# Altium PCB Backplane.PCBDOC
Units mil, origin at the board's own origin, x right, y up, seen from the top; angles counter-clockwise.
Board outline 3675 x 4000 mil, 4 copper layers (Top Layer, Signal Layer 1, Signal Layer 2, Bottom Layer), stack 30.634 mil thick; 91 components, 116 nets, 679 pads, 0 vias.
Unrouted connection lines stored in the file: 461.
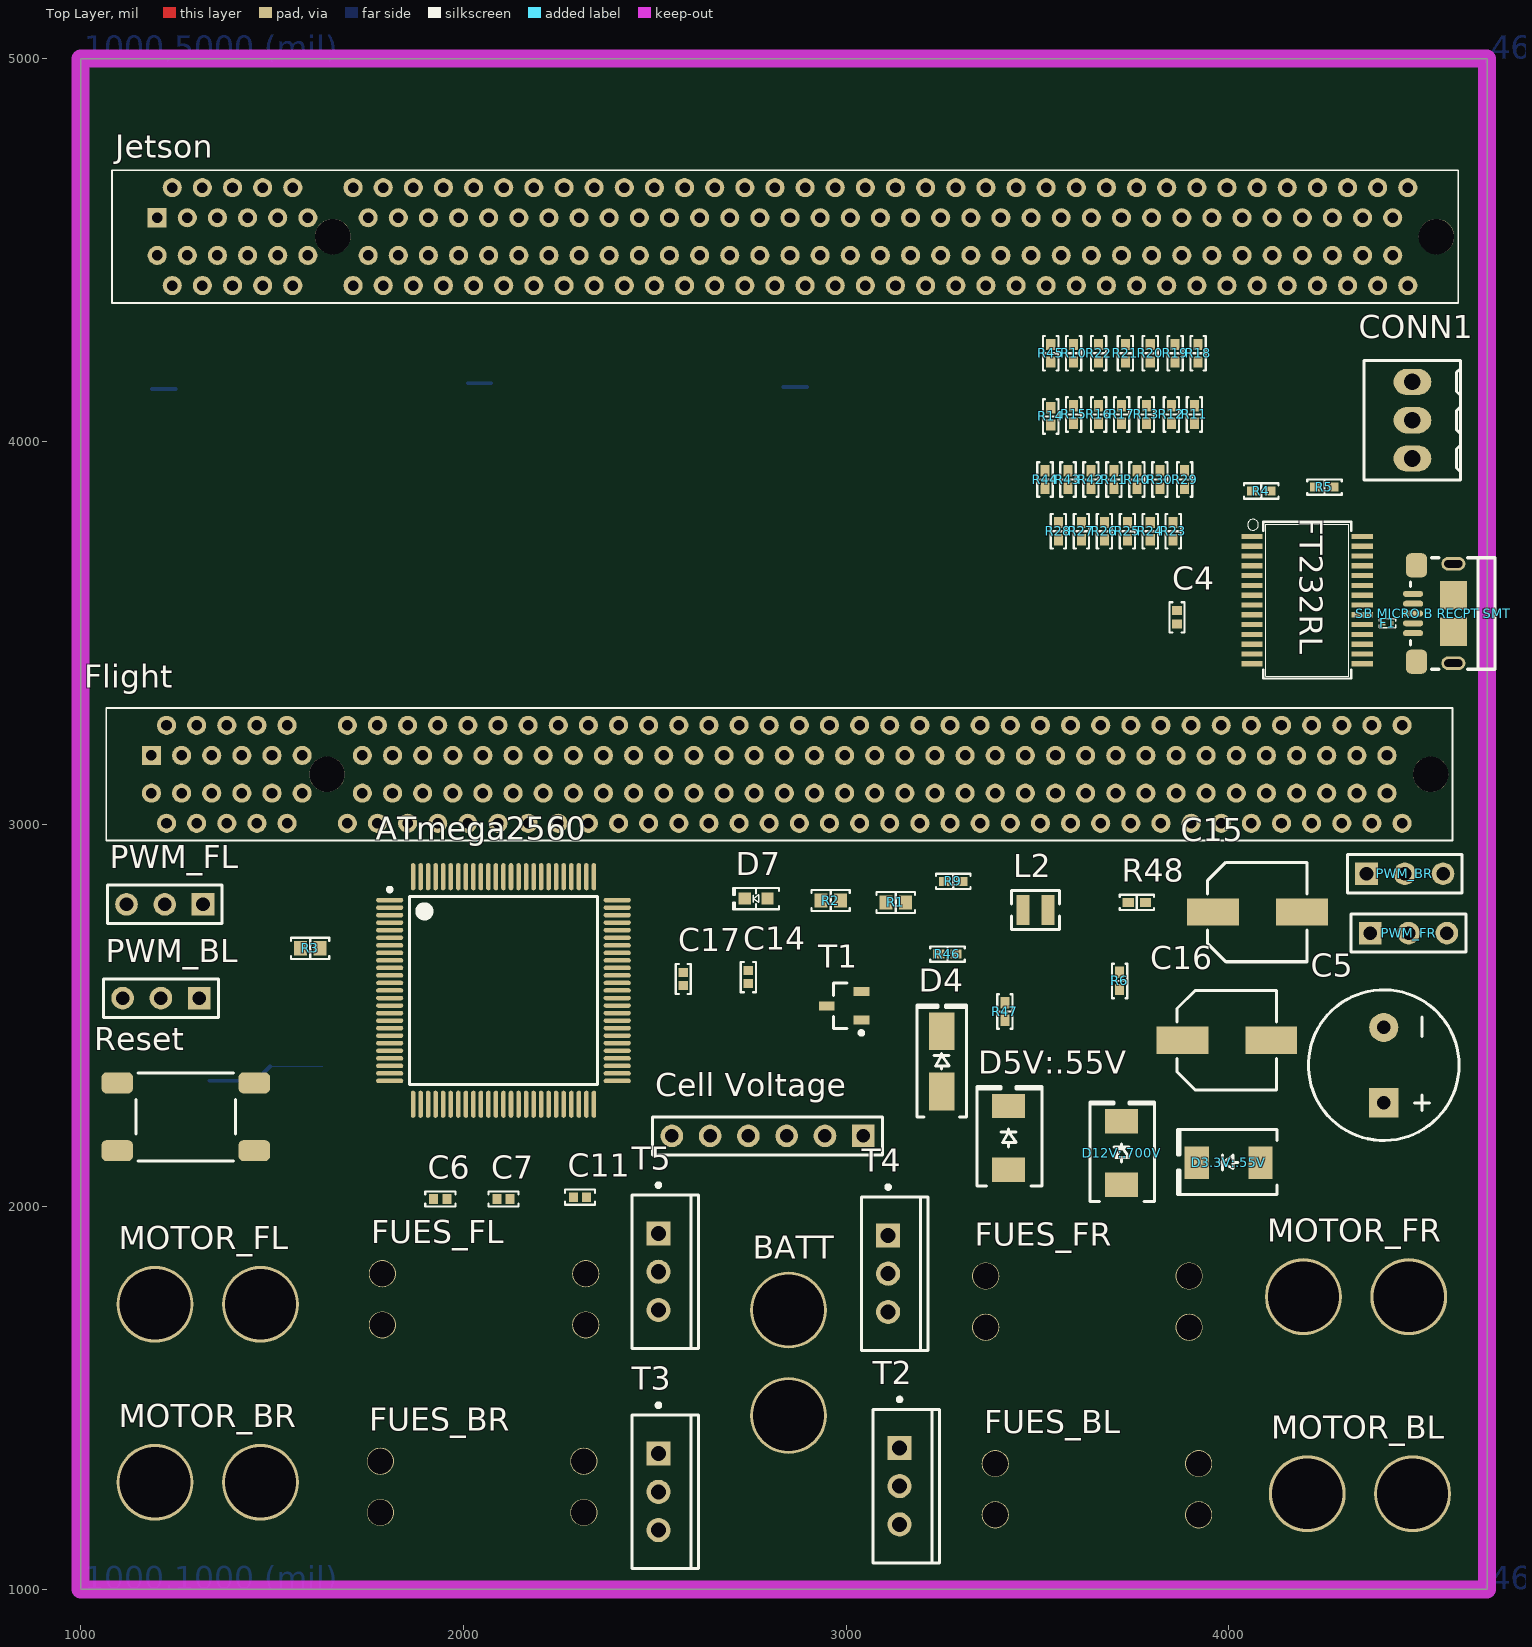
[diagram p0: Top Layer view]
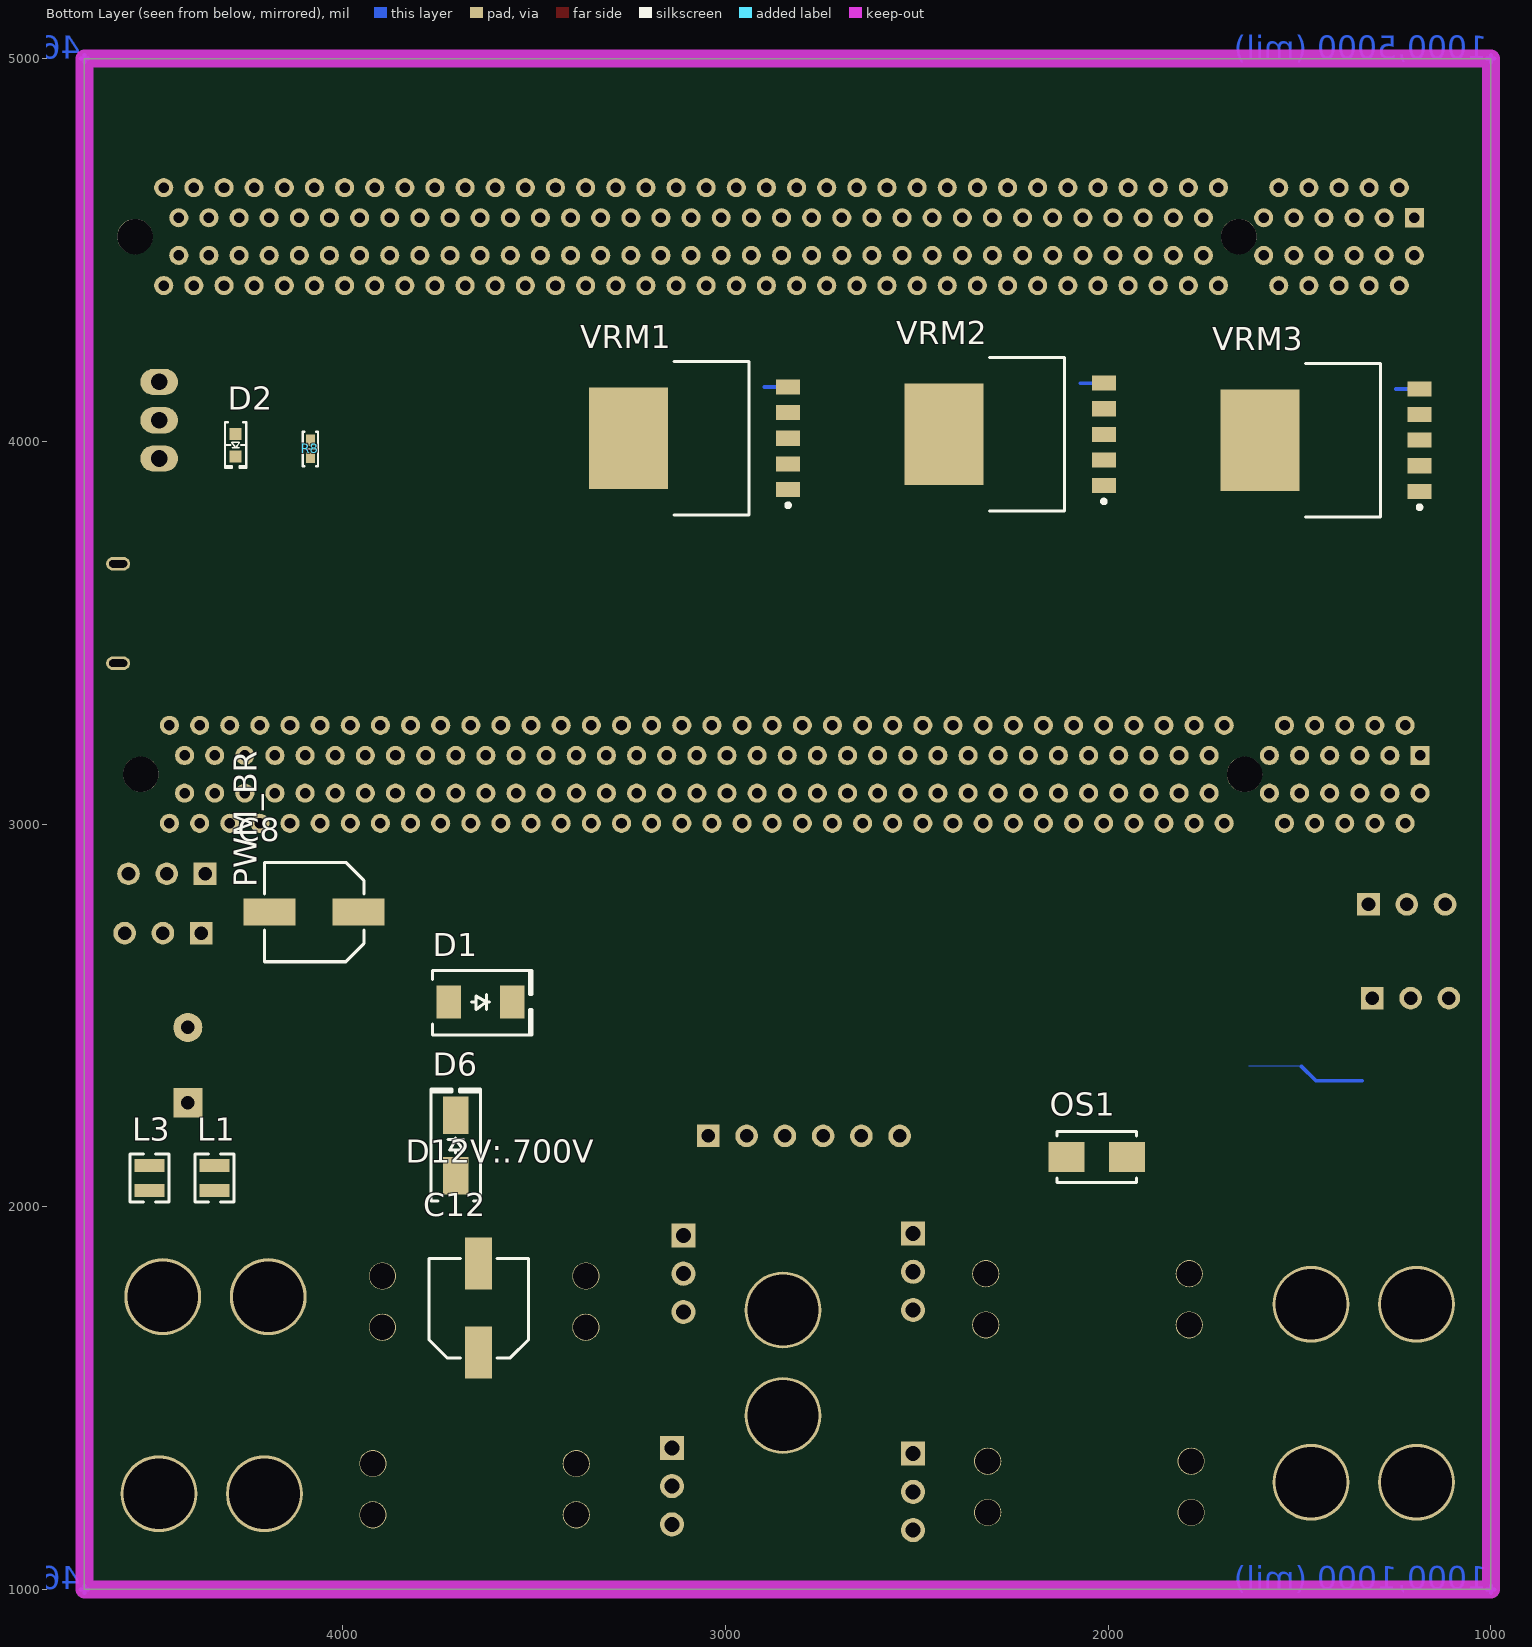
[diagram p1: Bottom Layer view, seen from below]

## Layer stack, top to bottom
Top Solder: solder mask 0.4, Solder Resist, Dk 3.5
Top Layer: signal copper 1.4
Dielectric 1: core 10, FR-4, Dk 4.2
Signal Layer 1: signal copper 1.417
Dielectric 4: prepreg 5, Dk 4.2
Signal Layer 2: signal copper 1.417
Dielectric 3: core 10, Dk 4.2
Bottom Layer: signal copper 1.4
Bottom Solder: solder mask 0.4, Solder Resist, Dk 3.5

## Board outline
1000,1000 4675,1000 4675,2015 4675,2520 4675,3035 4675,4020 4675,4515 4675,5000 1000,5000

## Design rules (kind name [scope] priority, off if disabled: settings)
Clearance Clearance_1 [All] p1: gap=5 except(10: Arc-Arc)
DiffPairsRouting [All] p1: maxlimit=10 minlimit=10 mostfreqgap=10 toplayer_minwidth=15 toplayer_maxwidth=15 toplayer_prefwidth=15 midlayer1_minwidth=15 midlayer1_maxwidth=15 midlayer1_prefwidth=15 midlayer2_minwidth=15 midlayer2_maxwidth=15 midlayer2_prefwidth=15 bottomlayer_minwidth=15 bottomlayer_maxwidth=15 bottomlayer_prefwidth=15 maxuncoupledlength=500
PolygonConnect [All] p1: connectstyle=Relief reliefconductorwidth=10 reliefentries=4 polygonreliefangle="90 Angle" airgapwidth=10
RoutingVias [All] p1: holewidth=28 width=50 viastyle="Through Hole" minholewidth=28 minwidth=50 maxholewidth=28 maxwidth=50
SMDNeckDown [All] p1: percent=25.000
SolderMaskExpansion [All] p1: expansion=4
Width "Power 3.3V" [InNet('3.3V')] p1: maxlimit=100 minlimit=50 preferedwidth=75 minimp=50.000000 maximp=50.000000 favimp=50.000000
Width "Power 5V" [InNet('5V')] p2: maxlimit=200 minlimit=10 preferedwidth=75 minimp=50.000000 maximp=50.000000 favimp=50.000000
Width "Power 12V" [InNet('12V')] p3: maxlimit=200 minlimit=10 preferedwidth=75 minimp=50.000000 maximp=50.000000 favimp=50.000000
Width Batt_VDD [InNet('BATT_VDD')] p4: maxlimit=200 minlimit=10 preferedwidth=75 minimp=50.000000 maximp=50.000000 favimp=50.000000
Width [All] p5: maxlimit=200 minlimit=5 preferedwidth=10 minimp=50.000000 maximp=50.000000 favimp=50.000000
29 further rules are at their usual default settings.

## Classes and differential pairs
component class "Motor Controls": FUES_BL FUES_BR FUES_FL FUES_FR MOTOR_BL MOTOR_BR MOTOR_FL MOTOR_FR PWM_BL PWM_BR PWM_FL PWM_FR
component class "BackPlane Connector": Flight Jetson
net class CV[5..0]: CV0 CV1 CV2 CV3 CV4 CV5
component class U_VoltageRegulator12V: C16 C17 C43 C44 C45 C46 D10 D12V:.700V L3 R59 R60 R61 R62 R63 R66 R67 R68 T10 T11 VRM3
component class U_VoltageRegulator5V: C14 C15 C23 C24 C25 C26 C27 C28 C29 C30 C31 C32 C33 C34 D5V:.55V D9 L2 R55 R56 R57 R58 R64 R65 T8 T9 VRM2
component class U_VoltageRegulator3: C11 C12 C51 D3.3V:.55V D8 L1 R49 R50 R52 R53 R54 T6 T7 VRM1
component class MCU-Atmega2560: ATmega2560 C6 C7 C8 CONN1 D6 D7 OS1 R46 R47 R48
component class Programmer: C4 C5 D2 D4 F1 FT232RL R4 R5 R6 R8 R9 Reset "SB MICRO B RECPT SMT"
component class "Kill Switch": D1 R1 R2 R3 T1 T2 T3 T4 T5
component class BatteryCircuit: BATT "Cell Voltage" R10 R11 R12 R13 R14 R15 R16 R17 R18 R19 R20 R21 R22 R23 R24 R25 R26 R27 R28 R29 R30 R40 R41 R42 R43 R44 R45
differential pair LVDS_8: +LVDS_8_P -LVDS_8_N
differential pair LVDS_7: +LVDS_7_P -LVDS_7_N
differential pair LVDS_6: +LVDS_6_P -LVDS_6_N
differential pair LVDS_5: +LVDS_5_P -LVDS_5_N
differential pair LVDS_4: +LVDS_4_P -LVDS_4_N
differential pair LVDS_3: +LVDS_3_P -LVDS_3_N
differential pair LVDS_2: +LVDS_2_P -LVDS_2_N
differential pair LVDS_1: +LVDS_1_P -LVDS_1_N

## Components (designator, comment, footprint, x,y, rotation, side; value= is the part's Value field where it differs from the comment)
ATmega2560 "ATmega2560-16AU" 100A_N 2105,2565 r0 top
BATT "XT60" XT60#1 2850,1730 r180 top
C4 "0.1uF" "CAP 0402/1005" 3865,3540 r270 top
C5 "10uF" CPOL-RADIAL-5MM-10MM-KIT 4405,2370 r270 top
C6 "0.1uF" "CAP 0402/1005" 1940,2020 r0 top
C7 "0.1uF" "CAP 0402/1005" 2105,2020 r180 top
C8 "33uF" "CAP ALUM 6.6MM" 4075,2770 r0 bottom
C11 "0.1uF" "CAP 0402/1005" 2305,2025 r0 top
C12 "100uF" "CAP ALUM 6.6MM" 3645,1735 r90 bottom
C14 "0.1uF" "CAP 0402/1005" 2745,2600 r270 top
C15 "100uF" "CAP ALUM 6.6MM" 4075,2770 r0 top
C16 "100uF" "CAP ALUM 6.6MM" 3995,2435 r0 top
C17 "0.1uF" "CAP 0402/1005" 2575,2595 r270 top
"Cell Voltage" "Header 6" HDR1X6 3045,2185 r180 top
CONN1 "282834-3" "TE 282834-3" 4480,4055 r270 top
D1 "SMBJ30A-TR" "ST DO214AA SMB" 3640,2535 r180 bottom
D2 "Green" "LED 0603/1608 GREEN" 4280,3990 r270 bottom
D3.3V:.55V "SMLVT3V3" "ST DO214AA SMB" 4000,2115 r180 top
D4 "SMAJ5.0A" "DO214AC SMA" 3250,2380 r90 top
D5V:.55V "SMLVT3V3" "ST DO214AA SMB" 3425,2180 r90 top
D6 "SMAJ5.0A" "DO214AC SMA" 3705,2160 r90 bottom
D7 "White" "LED 0603/1608" 2765,2805 r180 top
D12V:.700V "SMLVT3V3" "ST DO214AA SMB" 3720,2140 r90 top
F1 "120 Ohm @ 100MHz" "FER 0201/0603" 4415,3525 r180 top
Flight "Copy from  con-pci_express(pci-e).lbr uploaded Mon Jul 2 10:15:25 2007   Library for PCI-Express x16 (PCI-E) connector. Includes connector and card edge pattern. Uploaded by JF Duval <jfduval@aqra.ca> from AQRA.ca" PCI-E-164 2760,3120 r0 top
FT232RL "FT232RL USB UART    This is the simplified version of the FT232RL unit. Only what you need, nothing you don't.   FT232RL 4th Generation USB UART (USB <-> Serial) Controller.   Datasheet SparkFun Products  Component (COM-00650)  SparkFun RedBot Mainboard (ROB-12097)  SparkFun FTDI Basic Breakout - 5V (DEV-09716)  SparkFun FTDI Basic Breakout - 3.3V (DEV-09873)  Bus Pirate - v3.6a (TOL-12942)  SparkFun USB to Serial Breakout - FT232RL (BOB-12731)  SparkFun PicoBoard (WIG-11888)  SparkFun RFID USB Reader (SEN-09963)  LilyPad FTDI Basic Breakout - 5V (DEV-10275)  SparkFun Stepoko (ROB-13899)" SSOP28DB 4205,3585 r270 top
FUES_BL "Blade Fuse" "Blade Fuse Holder" 3390,1195 r0 top locked
FUES_BR "Blade Fuse" "Blade Fuse Holder" 2315,1335 r180 top
FUES_FL "Blade Fuse" "Blade Fuse Holder" 2320,1825 r180 top
FUES_FR "Blade Fuse" "Blade Fuse Holder" 3365,1685 r0 top
Jetson "Copy from  con-pci_express(pci-e).lbr uploaded Mon Jul 2 10:15:25 2007   Library for PCI-Express x16 (PCI-E) connector. Includes connector and card edge pattern. Uploaded by JF Duval <jfduval@aqra.ca> from AQRA.ca" PCI-E-164 2775,4525 r0 top
L1 "1uH" "TDK VLS252010CX" 4335,2075 r90 bottom
L2 "1uH" "TDK VLS252010CX" 3495,2775 r0 top
L3 "1uH" "TDK VLS252010CX" 4505,2075 r90 bottom
MOTOR_BL "XT60" XT60#1 4205,1250 r270 top
MOTOR_BR "XT60" XT60#2 1470,1280 r90 top
MOTOR_FL "XT60" XT60#1 1470,1745 r90 top
MOTOR_FR "XT60" XT60#1 4195,1765 r270 top
OS1 "10MHz" "NDK NX5032GA" 2030,2130 r0 bottom
PWM_BL "Header 3" HDR1X3 1310,2545 r180 top
PWM_BR "Header 3" HDR1X3 4360,2870 r0 top
PWM_FL "Header 3" HDR1X3 1320,2790 r180 top
PWM_FR "Header 3" HDR1X3 4370,2715 r0 top
R1 "0.0" "RES 0603/1608" 3130,2795 r180 top
R2 "0.0" "RES 0603/1608" 2960,2800 r0 top
R3 "0.0" "RES 0603/1608" 1600,2675 r0 top
R4 "10k" "RES 0402/1005" 4085,3870 r180 top
R5 "10k" "RES 0402/1005" 4250,3880 r0 top
R6 "10k" "RES 0402/1005" 3715,2590 r270 top
R8 "10k" "RES 0402/1005" 4085,3980 r270 bottom
R9 "10K" "RES 0402/1005" 3280,2850 r0 top
R10 "10k" "RES 0402/1005" 3595,4230 r90 top
R11 "10k" "RES 0402/1005" 3910,4070 r270 top
R12 "10k" "RES 0402/1005" 3850,4070 r90 top
R13 "10k" "RES 0402/1005" 3785,4070 r270 top
R14 "10k" "RES 0402/1005" 3535,4065 r90 top
R15 "10k" "RES 0402/1005" 3595,4070 r270 top
R16 "10k" "RES 0402/1005" 3660,4070 r90 top
R17 "10k" "RES 0402/1005" 3720,4070 r270 top
R18 "10k" "RES 0402/1005" 3920,4230 r90 top
R19 "10k" "RES 0402/1005" 3860,4230 r270 top
R20 "10k" "RES 0402/1005" 3795,4230 r90 top
R21 "10k" "RES 0402/1005" 3730,4230 r270 top
R22 "10k" "RES 0402/1005" 3660,4230 r90 top
R23 "10k" "RES 0402/1005" 3855,3765 r270 top
R24 "10k" "RES 0402/1005" 3795,3765 r270 top
R25 "10k" "RES 0402/1005" 3735,3765 r90 top
R26 "10k" "RES 0402/1005" 3675,3765 r270 top
R27 "10k" "RES 0402/1005" 3615,3765 r90 top
R28 "10k" "RES 0402/1005" 3555,3765 r270 top
R29 "10k" "RES 0402/1005" 3885,3900 r270 top
R30 "10k" "RES 0402/1005" 3820,3900 r90 top
R40 "10k" "RES 0402/1005" 3760,3900 r270 top
R41 "10k" "RES 0402/1005" 3700,3900 r90 top
R42 "10k" "RES 0402/1005" 3640,3900 r90 top
R43 "10k" "RES 0402/1005" 3580,3900 r270 top
R44 "10k" "RES 0402/1005" 3520,3900 r90 top
R45 "10k" "RES 0402/1005" 3535,4230 r270 top
R46 "10K" "RES 0402/1005" 3265,2660 r180 top
R47 "10K" "RES 0402/1005" 3415,2510 r90 top
R48 "10K" "RES 0402/1005" 3760,2795 r180 top
Reset "FSM6JSMA" "TE FSM6JSMA" 1275,2235 r90 top
"SB MICRO B RECPT SMT" "Micro USB" "FCI USB 10118193-0001LF" 4585,3550 r270 top
T1 "BSS215P H6327" INF-PG-SOT23_N 2995,2525 r180 top
T2 "IPP120P04P4L-03" INF-PG-TO220-3-1 3140,1270 r0 top
T3 "IPP120P04P4L-03" INF-PG-TO220-3-1 2510,1255 r0 top
T4 "IPP120P04P4L-03" INF-PG-TO220-3-1 3110,1825 r0 top
T5 "IPP120P04P4L-03" INF-PG-TO220-3-1 2510,1830 r0 top
VRM1 "LM2596SX-12" DPAK170P1418X200-6L 5120,4945 r0 bottom
VRM2 "LM2596SX-12" DPAK170P1418X200-6L 4295,4955 r0 bottom
VRM3 "LM2596SX-12" DPAK170P1418X200-6L 3470,4940 r0 bottom

## Footprints (in the part's own frame and the unit in brackets; to place one, negate y for a bottom-side part, rotate by r counter-clockwise, add the part's x,y. Pads: shape width x height; smd on the part's side, far side on the other; paste and mask are expansions set on the pad)
100A_N [mm] "Thin QFP, 100-Leads, Body 14x14mm, Pitch 0.5mm, IPC Medium Density"
  oval 1.8x0.3 smd: 1(-7.55,6) 2(-7.55,5.5) 3(-7.55,5) 4(-7.55,4.5) 5(-7.55,4) 6(-7.55,3.5) 7(-7.55,3) 8(-7.55,2.5) 9(-7.55,2) 10(-7.55,1.5) 11(-7.55,1) 12(-7.55,0.5) 13(-7.55,0) 14(-7.55,-0.5) 15(-7.55,-1) 16(-7.55,-1.5) 17(-7.55,-2) 18(-7.55,-2.5) 19(-7.55,-3) 20(-7.55,-3.5) 21(-7.55,-4) 22(-7.55,-4.5) 23(-7.55,-5) 24(-7.55,-5.5) 25(-7.55,-6) 51(7.55,-6) 52(7.55,-5.5) 53(7.55,-5) 54(7.55,-4.5) 55(7.55,-4) 56(7.55,-3.5) 57(7.55,-3) 58(7.55,-2.5) 59(7.55,-2) 60(7.55,-1.5) 61(7.55,-1) 62(7.55,-0.5) 63(7.55,0) 64(7.55,0.5) 65(7.55,1) 66(7.55,1.5) 67(7.55,2) 68(7.55,2.5) 69(7.55,3) 70(7.55,3.5) 71(7.55,4) 72(7.55,4.5) 73(7.55,5) 74(7.55,5.5) 75(7.55,6)
  oval 0.3x1.8 smd: 26(-6,-7.55) 27(-5.5,-7.55) 28(-5,-7.55) 29(-4.5,-7.55) 30(-4,-7.55) 31(-3.5,-7.55) 32(-3,-7.55) 33(-2.5,-7.55) 34(-2,-7.55) 35(-1.5,-7.55) 36(-1,-7.55) 37(-0.5,-7.55) 38(0,-7.55) 39(0.5,-7.55) 40(1,-7.55) 41(1.5,-7.55) 42(2,-7.55) 43(2.5,-7.55) 44(3,-7.55) 45(3.5,-7.55) 46(4,-7.55) 47(4.5,-7.55) 48(5,-7.55) 49(5.5,-7.55) 50(6,-7.55) 76(6,7.55) 77(5.5,7.55) 78(5,7.55) 79(4.5,7.55) 80(4,7.55) 81(3.5,7.55) 82(3,7.55) 83(2.5,7.55) 84(2,7.55) 85(1.5,7.55) 86(1,7.55) 87(0.5,7.55) 88(0,7.55) 89(-0.5,7.55) 90(-1,7.55) 91(-1.5,7.55) 92(-2,7.55) 93(-2.5,7.55) 94(-3,7.55) 95(-3.5,7.55) 96(-4,7.55) 97(-4.5,7.55) 98(-5,7.55) 99(-5.5,7.55) 100(-6,7.55)
  silkscreen extent -7.67,-6.25 6.25,6.82, body extent -7,-7 7,7, height 1.2
"Blade Fuse Holder" [mm] "Automotive blade fuse holder"
  round 1.8 hole 1.7: DRAIN(13.5,0) DRAIN(13.5,3.4) SRC(0,0) SRC(0,3.4)
"CAP 0402/1005" [mm] "Chip Capacitor, 2-Leads, Body 1.02x0.51mm, IPC Medium Density"
  rect 0.6x0.64 smd: 1(-0.44,0) 2(0.44,0)
  silkscreen extent -1,-0.5 1,0.5, body extent -0.5,-0.26 0.5,0.26, height 0.52
"CAP ALUM 6.6MM" [mm] "Aluminum Electrolytic Capacitor, Body 6.60x6.60x7.70mm, IPC Low Density"
  rect 3.45x1.8 smd: 1(-2.95,0) 2(2.95,0)
  silkscreen extent -3.3,-3.3 3.3,3.3, body extent -3.5,-3.3 3.5,3.3, height 7.7
CPOL-RADIAL-5MM-10MM-KIT [mil]
  rect 76x76 hole 35.43: +(98.43,0)
  round 76 hole 35.43: -(-98.43,0)
  silkscreen extent -197,-197 197,197
"DO214AC SMA" [mm] "Molded Diode, 2-Leads, Body 4.30x2.60mm, IPC Medium Density"
  rect 2.5x1.7 smd: 1(-2,0) 2(2,0)
  silkscreen extent -3.68,-1.65 3.75,1.65, body extent -2.6,-1.37 2.6,1.37, height 2.4
DPAK170P1418X200-6L [mm] "D2-PAK, 6-Pads, Body 8.02x8.44mm (max), IPC High Density"
  rect 1.6x1 smd: FB(-58,22.1) GND(-58,23.8) ON/OFF(-58,20.4) Output(-58,25.5) VIN(-58,27.2)
  rect 5.24x6.75 smd: GND(-47.4,23.8)
  silkscreen extent -58.12,18.7 -50.42,28.9, body extent -55.4,18.73 -45.55,28.88, height 2
"FCI USB 10118193-0001LF" [mm] "USB 2.0 Type B Micro"
  oval 0.4x1.35 smd: 1(1.3,-2.625) 2(0.65,-2.625) 3(0,-2.625) 4(-0.65,-2.625) 5(-1.3,-2.625)
  oval 0.9x1.6 hole 0.5 slot 1.2 at 90 deg: S(-3.3,0.05) S(3.3,0.05)
  rrect50% 1.6x1.4 smd: S(-3.2,-2.4) S(3.2,-2.4)
  rect 1.9x1.8 smd: S(-1.2,0.05) S(1.2,0.05)
  silkscreen extent -3.7,-2.8 3.7,2.8, body extent -3.93,-2.9 3.93,2.76, height 2.78
"FER 0201/0603" [mm] "Chip Inductor, 2-Leads, Body 0.60x0.30mm, IPC Medium Density"
  rect 0.25x0.3 smd: 1(-0.275,0) 2(0.275,0)
  silkscreen extent -0.55,-0.3 0.55,0.3, body extent -0.3,-0.15 0.3,0.15, height 0.29
HDR1X3 [mm] "Connector; Header; 3 Position"
  rect 1.5x1.5 hole 0.9: 1(0,0)
  round 1.5 hole 0.9: 2(2.54,0) 3(5.08,0)
  silkscreen extent -1.27,-1.27 6.35,1.27
HDR1X6 [mm] "Connector; Header; 6 Position"
  rect 1.5x1.5 hole 0.9: 1(0,0)
  round 1.5 hole 0.9: 2(2.54,0) 3(5.08,0) 4(7.62,0) 5(10.16,0) 6(12.7,0)
  silkscreen extent -1.27,-1.27 13.97,1.27
INF-PG-SOT23_N [mm] "SOT23, 3-Leads, Body 2.9x1.3mm, Pitch 0.95mm, IPC Medium Density"
  rect 1.05x0.6 smd: 1(-1.15,0.95) 2(-1.15,-0.95) 3(1.15,0)
  silkscreen extent -1.28,-1.5 0.7,1.92, body extent -0.7,-1.5 0.7,1.5, height 1.1
INF-PG-TO220-3-1 [mm] "FM, 3-Leads, Body 10x4.4mm, Pitch 2.54mm"
  rect 1.6x1.6 hole 1: 1(0,2.54)
  round 1.6 hole 1: 2(0,0) 3(0,-2.54)
  silkscreen extent -1.75,-5.1 2.65,5.87, body extent -1.75,-5.1 2.65,5.1, height 20.7
"LED 0603/1608" [mm] "Chip Diode, 2-Leads, Body 1.60x0.80mm, IPC Medium Density"
  rect 0.8x0.8 smd: 1(-0.75,0) 2(0.75,0)
  silkscreen extent -1.52,-0.7 1.52,0.7, body extent -0.8,-0.4 0.8,0.4, height 0.53
"LED 0603/1608 GREEN" [mm] "Chip Diode, 2-Leads, Body 1.60x0.80mm, IPC Medium Density"
  rect 0.8x0.8 smd: 1(-0.75,0) 2(0.75,0)
  silkscreen extent -1.52,-0.7 1.52,0.7, body extent -0.8,-0.4 0.8,0.4, height 0.53
"NDK NX5032GA" [mm] "Crystal, 2-Leads, Body 5.00x3.20mm, IPC Medium Density"
  rect 2.4x2 smd: 1(-2,0) 2(2,0)
  silkscreen extent -2.65,-1.7 2.65,1.7, body extent -2.5,-1.6 2.5,1.6, height 1.2
PCI-E-164 [mm]
  round 2.35 hole 2.35: 1(-28.35,0.25) 1(44.9,0.25)
  rect 1.27x1.27 hole 0.7: A1(-40,1.5)
  round 1.27 hole 0.7: A2(-39,3.5) A3(-38,1.5) A4(-37,3.5) A5(-36,1.5) A6(-35,3.5) A7(-34,1.5) A8(-33,3.5) A9(-32,1.5) A10(-31,3.5) A11(-30,1.5) A12(-27,3.5) A13(-26,1.5) A14(-25,3.5) A15(-24,1.5) A16(-23,3.5) A17(-22,1.5) A18(-21,3.5) A19(-20,1.5) A20(-19,3.5) A21(-18,1.5) A22(-17,3.5) A23(-16,1.5) A24(-15,3.5) A25(-14,1.5) A26(-13,3.5) A27(-12,1.5) A28(-11,3.5) A29(-10,1.5) A30(-9,3.5) A31(-8,1.5) A32(-7,3.5) A33(-6,1.5) A34(-5,3.5) A35(-4,1.5) A36(-3,3.5) A37(-2,1.5) A38(-1,3.5) A39(0,1.5) A40(1,3.5) A41(2,1.5) A42(3,3.5) A43(4,1.5) A44(5,3.5) A45(6,1.5) A46(7,3.5) A47(8,1.5) A48(9,3.5) A49(10,1.5) A50(11,3.5) A51(12,1.5) A52(13,3.5) A53(14,1.5) A54(15,3.5) A55(16,1.5) A56(17,3.5) A57(18,1.5) A58(19,3.5) A59(20,1.5) A60(21,3.5) A61(22,1.5) A62(23,3.5) A63(24,1.5) A64(25,3.5) A65(26,1.5) A66(27,3.5) A67(28,1.5) A68(29,3.5) A69(30,1.5) A70(31,3.5) A71(32,1.5) A72(33,3.5) A73(34,1.5) A74(35,3.5) A75(36,1.5) A76(37,3.5) A77(38,1.5) A78(39,3.5) A79(40,1.5) A80(41,3.5) A81(42,1.5) A82(43,3.5) B1(-40,-1) B2(-39,-3) B3(-38,-1) B4(-37,-3) B5(-36,-1) B6(-35,-3) B7(-34,-1) B8(-33,-3) B9(-32,-1) B10(-31,-3) B11(-30,-1) B12(-27,-3) B13(-26,-1) B14(-25,-3) B15(-24,-1) B16(-23,-3) B17(-22,-1) B18(-21,-3) B19(-20,-1) B20(-19,-3) B21(-18,-1) B22(-17,-3) B23(-16,-1) B24(-15,-3) B25(-14,-1) B26(-13,-3) B27(-12,-1) B28(-11,-3) B29(-10,-1) B30(-9,-3) B31(-8,-1) B32(-7,-3) B33(-6,-1) B34(-5,-3) B35(-4,-1) B36(-3,-3) B37(-2,-1) B38(-1,-3) B39(0,-1) B40(1,-3) B41(2,-1) B42(3,-3) B43(4,-1) B44(5,-3) B45(6,-1) B46(7,-3) B47(8,-1) B48(9,-3) B49(10,-1) B50(11,-3) B51(12,-1) B52(13,-3) B53(14,-1) B54(15,-3) B55(16,-1) B56(17,-3) B57(18,-1) B58(19,-3) B59(20,-1) B60(21,-3) B61(22,-1) B62(23,-3) B63(24,-1) B64(25,-3) B65(26,-1) B66(27,-3) B67(28,-1) B68(29,-3) B69(30,-1) B70(31,-3) B71(32,-1) B72(33,-3) B73(34,-1) B74(35,-3) B75(36,-1) B76(37,-3) B77(38,-1) B78(39,-3) B79(40,-1) B80(41,-3) B81(42,-1) B82(43,-3)
  silkscreen extent -43,-4.15 46.35,4.65
"RES 0402/1005" [mm] "Chip Resistor, 2-Leads, Body 1.0x0.5mm, IPC Medium Density"
  rect 0.75x0.6 smd: 1(-0.575,0) 2(0.575,0)
  silkscreen extent -1.14,-0.51 1.14,0.51, body extent -0.5,-0.25 0.5,0.25, height 0.35
"RES 0603/1608" [mm] "Chip Resistor, 2-Leads, Body 1.60x0.80mm, IPC Medium Density"
  rect 0.85x0.95 smd: 1(-0.65,0) 2(0.65,0)
  silkscreen extent -1.27,-0.7 1.27,0.7, body extent -0.8,-0.4 0.8,0.4, height 0.45
SSOP28DB [mil]
  rect 13.7x55 smd: 1(-166.34,-143.94) 2(-140.75,-143.94) 3(-115.16,-143.94) 4(-89.57,-143.94) 5(-63.98,-143.94) 6(-38.39,-143.94) 7(-12.8,-143.94) 8(12.8,-143.94) 9(38.39,-143.94) 10(63.98,-143.94) 11(89.57,-143.94) 12(115.16,-143.94) 13(140.75,-143.94) 14(166.34,-143.94) 15(166.34,143.94) 16(140.75,143.94) 17(115.16,143.94) 18(89.57,143.94) 19(63.98,143.94) 20(38.39,143.94) 21(12.8,143.94) 22(-12.8,143.94) 23(-38.39,143.94) 24(-63.98,143.94) 25(-89.57,143.94) 26(-115.16,143.94) 27(-140.75,143.94) 28(-166.34,143.94)
  silkscreen extent -211,-156 205,115
"ST DO214AA SMB" [mm] "Molded Diode, 2-Leads, Body 4.31x3.62mm, IPC Medium Density"
  rect 1.62x2.18 smd: 1(-2.11,0) 2(2.11,0)
  silkscreen extent -3.2,-2.2 3.4,2.1, body extent -2.6,-1.8 2.6,1.8, height 2.4
"TDK VLS252010CX" [mm] "Chip Inductor, 2-Leads, Body 2.50x2.00mm, IPC Medium Density"
  rect 0.85x2 smd: 1(-0.825,0) 2(0.825,0)
  silkscreen extent -1.6,-1.3 1.6,1.3, body extent -1.25,-1 1.25,1, height 1
"TE 282834-3" [mm]
  oval 1.75x2.5 hole 1.1: 1(-2.54,0) 2(0,0) 3(2.54,0)
  silkscreen extent -3.97,-3.2 3.97,3.2, body extent -4.04,-3.25 4.04,3.25, height 10
"TE FSM6JSMA" [mm]
  rrect50% 1.4x2.1 smd: 1(2.25,4.55) 2(2.25,-4.55) 3(-2.25,4.55) 4(-2.25,-4.55)
  silkscreen extent -2.92,-3.3 2.92,3.3, body extent -3,-5 3,5, height 7.11
XT60#1 [mm] "XT60 Connector"
  round 5.1 hole 4.7: GND(0,7) VDD(0,0)
XT60#2 [mm] "XT60 Connector"
  round 5.1 hole 4.7: GND(0,7)
  round 5.1 hole 4.7 mask+0.102: VDD(0,0)

## Part data
ATmega2560: "8-bit AVR Microcontroller, 4.5-5.5V, 256KB Flash, 4KB EEPROM, 8KB SRAM, 86 GPIO pins, 100-pin TQFP, Industrial Grade (-40°C to 85°C), Pb-Free"
C4 C6 C7 C11 C14 C17: library part C1005X7R1C104K050BC, "CAP CER 0.1UF 16V X7R 0402"
C5: library part 1000UF-RADIAL-5MM-35V-20%-KIT
C8: library part UWX1C330MCL1GB, "CAP ALUM 33UF 20% 16V SMD"
C12 C15 C16: library part 16SVPC100M, "CAP POLYMER 100UF 20% 16V SMD"
"Cell Voltage": "Header, 6-Pin"
CONN1: "TERM BLOCK 3POS SIDE ENT 2.54MM"
D1: "TVS DIODE 30VWM 64.3VC SMB"
D2: library part LTST-C191KGKT, "LED GREEN CLEAR 0603 SMD"
D3.3V:.55V D5V:.55V D12V:.700V: "TVS DIODE 3.3VWM 10.3VC SMB"
D4 D6: "TVS DIODE 5VWM 9.2VC SMA"
D7: library part LTW-C191TS5, "LED WHITE 0603 SMD"
F1: library part BLM03AG121SN1D, "FERRITE BEAD 120 OHM 0201 1LN"
Flight Jetson: library part PCI-E-164SOCKET
FT232RL: library part FT232RL-BASICSSOP
L1 L2 L3: library part VLS252010CX-1R0M, "FIXED IND 1UH 2.29A 65 MOHM SMD"
OS1: library part NX5032GA-10.000M-STD-CSU-1, "CRYSTAL 10.0000MHZ 8PF SMD"
PWM_BL PWM_BR PWM_FL PWM_FR: "Header, 3-Pin"
R1 R2 R3: library part 5110, "RES SMD 0.0 OHM JUMPER 1/2W 0603"
R4 R5 R6 R8 R9 R10 R11 R12 R13 R14 R15 R16 R17 R18 R19 R20 R21 R22 R23 R24 R25 R26 R27 R28 R29 R30 R40 R41 R42 R43 R44 R45 R46 R47 R48: library part ERJ-2RKF1002X, "RES SMD 10K OHM 1% 1/10W 0402"
Reset: "SWITCH TACTILE SPST-NO 0.05A 24V"
"SB MICRO B RECPT SMT": library part 10118193-0001LF, "CONN USB MICRO B RECPT SMT R/A"
T1: "P-Channel OptiMOS P2 Small-Signal-Transistor, -20 V VDS, -1.5 A ID, -55 to 150 degC, PG-SOT23, Reel, Green"
T2 T3 T4 T5: "OptiMOS-P2 Power-Transistor, -40 V VDS, -120 A ID, PG-TO220-3-1, Tube, Green"

## Nets (pads, with @x,y where several pads share a name; then routed paths per layer and width w, separated by ;. In a path a pad name is that pad's centre, name@x,y a point inside that pad or via, vN(x,y) a via of type N, cw(c..) or ccw(c..) an arc to the next point about the centre after c; other vN are vias at no path point)
3.3V: C12.1 Flight.A16 Flight.A41 Flight.B16 Jetson.A16 Jetson.A41 Jetson.B16 L1.2 VRM1.FB
5V: ATmega2560.10 ATmega2560.31 ATmega2560.61 ATmega2560.80 ATmega2560.98 C15.1 CONN1.2 D6.2 Flight.A8 Flight.A47 Flight.B8 Flight.B26 Flight.B40 FT232RL.4 Jetson.A8 Jetson.A47 Jetson.B8 Jetson.B26 Jetson.B40 L2.2 PWM_BL.2 PWM_BR.2 PWM_FL.2 PWM_FR.2 R3.2 R6.1 R8.1 R9.2 R47.2 R48.2 VRM2.FB
12V: C16.1 Flight.A3 Flight.A11 Flight.A19 Flight.A31 Flight.A44 Flight.B3 Flight.B11 Flight.B19 Flight.B32 Flight.B49 Flight.B50 Flight.B51 Flight.B52 Flight.B53 Flight.B54 Flight.B55 Flight.B56 Flight.B57 Flight.B58 Flight.B59 Flight.B60 Flight.B61 Flight.B62 Flight.B63 Flight.B64 Flight.B65 Flight.B66 Flight.B67 Flight.B68 Flight.B69 Flight.B70 Flight.B71 Flight.B72 Flight.B73 Flight.B74 Flight.B75 Flight.B76 Flight.B77 Flight.B78 Flight.B79 Flight.B80 Flight.B81 Flight.B82 Jetson.A3 Jetson.A11 Jetson.A19 Jetson.A31 Jetson.A44 Jetson.B3 Jetson.B11 Jetson.B19 Jetson.B32 Jetson.B49 Jetson.B50 Jetson.B51 Jetson.B52 Jetson.B53 Jetson.B54 Jetson.B55 Jetson.B56 Jetson.B57 Jetson.B58 Jetson.B59 Jetson.B60 Jetson.B61 Jetson.B62 Jetson.B63 Jetson.B64 Jetson.B65 Jetson.B66 Jetson.B67 Jetson.B68 Jetson.B69 Jetson.B70 Jetson.B71 Jetson.B72 Jetson.B73 Jetson.B74 Jetson.B75 Jetson.B76 Jetson.B77 Jetson.B78 Jetson.B79 Jetson.B80 Jetson.B81 Jetson.B82 L3.2 VRM3.FB
BATT_GND: BATT.GND MOTOR_BL.GND MOTOR_BR.GND MOTOR_FL.GND MOTOR_FR.GND R10.1 R13.1 R17.1 R22.1 R28.1 R44.1
BATT_VDD: BATT.VDD C11.2 C14.2 C17.2 D1.2 R1.2 T2.3 T3.3 T4.3 T5.3 VRM1.VIN VRM2.VIN VRM3.VIN
CELL_VDD_READING0: R10.2 R45.1
CELL_VDD_READING1: R12.1 R13.2
CELL_VDD_READING2: R16.1 R17.2
CELL_VDD_READING3: R21.1 R22.2
CELL_VDD_READING4: R27.1 R28.2
CELL_VDD_READING5: R43.1 R44.2
CV0: ATmega2560.97
CV1: ATmega2560.96
CV2: ATmega2560.95
CV3: ATmega2560.94
CV4: ATmega2560.93
CV5: ATmega2560.92
FT232RL_VCC_5V: PWM_BL.1 PWM_BR.1 PWM_FL.1 PWM_FR.1
GND: "SB MICRO B RECPT SMT.5" ATmega2560.11 ATmega2560.32 ATmega2560.62 ATmega2560.81 ATmega2560.99 C5.- C6.2 C7.2 C8.2 C11.1 C12.2 C14.1 C15.2 C16.2 C17.1 CONN1.1 D3.3V:.55V.1 D4.2 D5V:.55V.1 D7.2 D12V:.700V.1 Flight.A1 Flight.A6 Flight.A13 Flight.A18 Flight.A21 Flight.A23 Flight.A29 Flight.A33 Flight.A37 Flight.A40 Flight.A43 Flight.A48 Flight.A49 Flight.A50 Flight.A51 Flight.A52 Flight.A53 Flight.A54 Flight.A55 Flight.A56 Flight.A57 Flight.A58 Flight.A59 Flight.A60 Flight.A61 Flight.A62 Flight.A63 Flight.A64 Flight.A65 Flight.A66 Flight.A67 Flight.A68 Flight.A69 Flight.A70 Flight.A71 Flight.A72 Flight.A73 Flight.A74 Flight.A75 Flight.A76 Flight.A77 Flight.A78 Flight.A79 Flight.A80 Flight.A81 Flight.A82 Flight.B1 Flight.B6 Flight.B13 Flight.B18 Flight.B21 Flight.B23 Flight.B30 Flight.B34 Flight.B38 Flight.B45 Flight.B48 FT232RL.7 FT232RL.18 FT232RL.21 FT232RL.25 FT232RL.26 Jetson.A1 Jetson.A6 Jetson.A13 Jetson.A18 Jetson.A21 Jetson.A23 Jetson.A29 Jetson.A33 Jetson.A37 Jetson.A40 Jetson.A43 Jetson.A48 Jetson.A49 Jetson.A50 Jetson.A51 Jetson.A52 Jetson.A53 Jetson.A54 Jetson.A55 Jetson.A56 Jetson.A57 Jetson.A58 Jetson.A59 Jetson.A60 Jetson.A61 Jetson.A62 Jetson.A63 Jetson.A64 Jetson.A65 Jetson.A66 Jetson.A67 Jetson.A68 Jetson.A69 Jetson.A70 Jetson.A71 Jetson.A72 Jetson.A73 Jetson.A74 Jetson.A75 Jetson.A76 Jetson.A77 Jetson.A78 Jetson.A79 Jetson.A80 Jetson.A81 Jetson.A82 Jetson.B1 Jetson.B6 Jetson.B13 Jetson.B18 Jetson.B21 Jetson.B23 Jetson.B30 Jetson.B34 Jetson.B38 Jetson.B45 Jetson.B48 Reset.1 Reset.2 T1.2 VRM1.GND VRM2.GND VRM3.GND
KILL: ATmega2560.15 Flight.A4 Flight.B4 Jetson.A4 Jetson.B4 R3.1 T1.1
KILLSWITCH: R2.1 T1.3 T2.1 T3.1 T4.1 T5.1
LVDS_1_N: Flight.A45 Jetson.A45
LVDS_1_P: Flight.B46 Jetson.B46
LVDS_2_N: Flight.A46 Jetson.A46
LVDS_2_P: Flight.B47 Jetson.B47
LVDS_3_N: Flight.B39 Jetson.B39
LVDS_3_P: Flight.A38 Jetson.A38
LVDS_4_N: Flight.A32 Jetson.A32
LVDS_4_P: Flight.B33 Jetson.B33
LVDS_5_N: Flight.B28 Jetson.B28
LVDS_5_P: Flight.A27 Jetson.A27
LVDS_6_N: Flight.B25 Jetson.B25
LVDS_6_P: Flight.A25 Jetson.A25
LVDS_7_N: Flight.B15 Jetson.B15
LVDS_7_P: Flight.A15 Jetson.A15
LVDS_8_N: Flight.B14 Jetson.B14
LVDS_8_P: Flight.A14 Jetson.A14
MISO_1: Flight.A7 Flight.B7 Jetson.A7 Jetson.B7
MISO_2: Flight.A10 Flight.B10 Jetson.A10 Jetson.B10
MISO_3: Flight.A12 Flight.B12 Jetson.A12 Jetson.B12
MISO_4: Flight.A20 Flight.B20 Jetson.A20 Jetson.B20
MOTOR_BL_POSTIVE: FUES_FR.SRC T4.2
MOTOR_BL_PWM: Flight.A39 Jetson.A39 PWM_BL.3
MOTOR_BR_POSTIVE: FUES_FL.SRC T5.2
MOTOR_BR_PWM: Flight.B41 Jetson.B41 PWM_FL.3
MOTOR_FL_POSTIVE: FUES_BR.SRC T3.2
MOTOR_FL_PWM: Flight.B42 Jetson.B42 PWM_FR.3
MOTOR_FR_POSTIVE: FUES_BL.SRC T2.2
MOTOR_FR_PWM: Flight.B44 Jetson.B44 PWM_BR.3
NetATmega2560_2: ATmega2560.2 R5.2
NetATmega2560_3: ATmega2560.3 R4.2
NetATmega2560_26: ATmega2560.26 R46.2
NetATmega2560_30: ATmega2560.30 C4.2 D6.1 R9.1 R47.1 Reset.3 Reset.4
NetATmega2560_33: ATmega2560.33 C7.1 OS1.1
NetATmega2560_34: ATmega2560.34 C6.1 OS1.2
NetATmega2560_100: ATmega2560.100 C8.1 R48.1
NetC1_2: C5.+ F1.2 FT232RL.20
NetC4_1: C4.1 FT232RL.2
"NetCell Voltage_1": "Cell Voltage.1" R45.2
"NetCell Voltage_2": "Cell Voltage.2" R11.2
"NetCell Voltage_3": "Cell Voltage.3" R14.2
"NetCell Voltage_4": "Cell Voltage.4" R18.2
"NetCell Voltage_5": "Cell Voltage.5" R23.2
"NetCell Voltage_6": "Cell Voltage.6" R29.2
NetD1_1: D1.1 R1.1 R2.2
NetD2_1: D2.1
NetD2_2: D2.2 FT232RL.22
NetD3.3V:.55V_2: D3.3V:.55V.2 L1.1 VRM1.Output
NetD3_1: R8.2
NetD3_2: FT232RL.23
NetD4_1: D4.1 R6.2
NetD5V:.55V_2: D5V:.55V.2 L2.1 VRM2.Output
NetD7_1: D7.1 R46.1
NetD12V:.700V_2: D12V:.700V.2 L3.1 VRM3.Output
NetFT232RL_1: FT232RL.1 R4.1
NetFT232RL_5: FT232RL.5 R5.1
NetFUES_BL_DRAIN: FUES_BL.DRAIN
NetFUES_BR_DRAIN: FUES_BR.DRAIN MOTOR_BR.VDD
NetFUES_FL_DRAIN: FUES_FL.DRAIN MOTOR_FL.VDD
NetFUES_FR_DRAIN: FUES_FR.DRAIN
NetR11_1: R11.1 R12.2
NetR14_1: R14.1 R15.2
NetR15_1: R15.1 R16.2
NetR18_1: R18.1 R19.2
NetR19_1: R19.1 R20.2
NetR20_1: R20.1 R21.2
NetR23_1: R23.1 R24.2
NetR24_1: R24.1 R25.2
NetR25_1: R25.1 R26.2
NetR26_1: R26.1 R27.2
NetR29_1: R29.1 R30.2
NetR30_1: R30.1 R40.2
NetR40_1: R40.1 R41.2
NetR41_1: R41.1 R42.2
NetR42_1: R42.1 R43.2
PWM_FAN_OUT: ATmega2560.25 CONN1.3
RX_1: Flight.A26 Flight.B27 Jetson.A26 Jetson.B27
RX_2: Flight.A34 Flight.B35 Jetson.A34 Jetson.B35
RX_4: Flight.A42 Jetson.A42
SCL: ATmega2560.43
SCL_1: Flight.A2 Flight.B2 Jetson.A2 Jetson.B2
SCL_2: Flight.A9 Flight.B9 Jetson.A9 Jetson.B9
SCL_3: Flight.A24 Flight.B24 Jetson.A24 Jetson.B24
SCL_PWR: Flight.A5 Flight.B5 Jetson.A5 Jetson.B5
SDA: ATmega2560.44
SPI_CC_1: Flight.A22 Flight.B22 Jetson.A22 Jetson.B22
SPI_CC_3: Flight.A28 Flight.B29 Jetson.A28 Jetson.B29
SPI_CC_5: Flight.A30 Flight.B31 Jetson.A30 Jetson.B31
SPI_CC_7: Flight.A35 Flight.B36 Jetson.A35 Jetson.B36
SPI_CC_8: Flight.A36 Flight.B37 Jetson.A36 Jetson.B37
SPI_CLK_3: Flight.A17 Flight.B17 Jetson.A17 Jetson.B17
TEMP_SENSOR: ATmega2560.91
TX_4: Flight.B43 Jetson.B43
USB_DN: "SB MICRO B RECPT SMT.2" FT232RL.16
USB_DP: "SB MICRO B RECPT SMT.3" FT232RL.15
USB_VIN: "SB MICRO B RECPT SMT.1" F1.1
pads on no net: "SB MICRO B RECPT SMT.4" "SB MICRO B RECPT SMT.S" ATmega2560.1 ATmega2560.4 ATmega2560.5 ATmega2560.6 ATmega2560.7 ATmega2560.8 ATmega2560.9 ATmega2560.12 ATmega2560.13 ATmega2560.14 ATmega2560.16 ATmega2560.17 ATmega2560.18 ATmega2560.19 ATmega2560.20 ATmega2560.21 ATmega2560.22 ATmega2560.23 ATmega2560.24 ATmega2560.27 ATmega2560.28 ATmega2560.29 ATmega2560.35 ATmega2560.36 ATmega2560.37 ATmega2560.38 ATmega2560.39 ATmega2560.40 ATmega2560.41 ATmega2560.42 ATmega2560.45 ATmega2560.46 ATmega2560.47 ATmega2560.48 ATmega2560.49 ATmega2560.50 ATmega2560.51 ATmega2560.52 ATmega2560.53 ATmega2560.54 ATmega2560.55 ATmega2560.56 ATmega2560.57 ATmega2560.58 ATmega2560.59 ATmega2560.60 ATmega2560.63 ATmega2560.64 ATmega2560.65 ATmega2560.66 ATmega2560.67 ATmega2560.68 ATmega2560.69 ATmega2560.70 ATmega2560.71 ATmega2560.72 ATmega2560.73 ATmega2560.74 ATmega2560.75 ATmega2560.76 ATmega2560.77 ATmega2560.78 ATmega2560.79 ATmega2560.82 ATmega2560.83 ATmega2560.84 ATmega2560.85 ATmega2560.86 ATmega2560.87 ATmega2560.88 ATmega2560.89 ATmega2560.90 Flight.1 FT232RL.3 FT232RL.6 FT232RL.8 FT232RL.9 FT232RL.10 FT232RL.11 FT232RL.12 FT232RL.13 FT232RL.14 FT232RL.17 FT232RL.19 FT232RL.24 FT232RL.27 FT232RL.28 Jetson.1 MOTOR_BL.VDD MOTOR_FR.VDD VRM1.ON/OFF VRM2.ON/OFF VRM3.ON/OFF
copper on no net: | length 656.1
  Bottom Layer w2.95: 1494.79,2366.57 1632.76,2366.57
  Bottom Layer w9.84: 1186.54,4136.85 1248.03,4136.85 ; 2011.54,4151.85 2073.03,4151.85 ; 2836.54,4141.85 2898.03,4141.85
  Bottom Layer w10: 990,1000 1010,1000 ; 990,5000 1010,5000 ; 1000,990 1000,1010 ; 1000,4990 1000,5010 ; 1336.75,2329 1457.21,2329 1494.79,2366.57 ; 4665,1000 4685,1000 ; 4665,5000 4685,5000 ; 4675,990 4675,1010 ; 4675,4990 4675,5010

## Keep-outs
Keep-Out Layer:
  the board outline again, w47.24

## Other copper
Bottom Layer:
  text "1000,5000 (mil)" at 1010,5000 h60
  text "4675,5000 (mil)" at 4685,5000 h60
  text "1000,1000 (mil)" at 1010,1000 h60
  text "4675,1000 (mil)" at 4685,1000 h60